# Altium PCB PCB_layout.PcbDoc
Units mil, origin at the board's own origin, x right, y up, seen from the top; angles counter-clockwise.
Board outline 2125 x 2230 mil, 2 copper layers (Top Layer, Bottom Layer); 26 components, 20 nets, 91 pads, 4 vias.
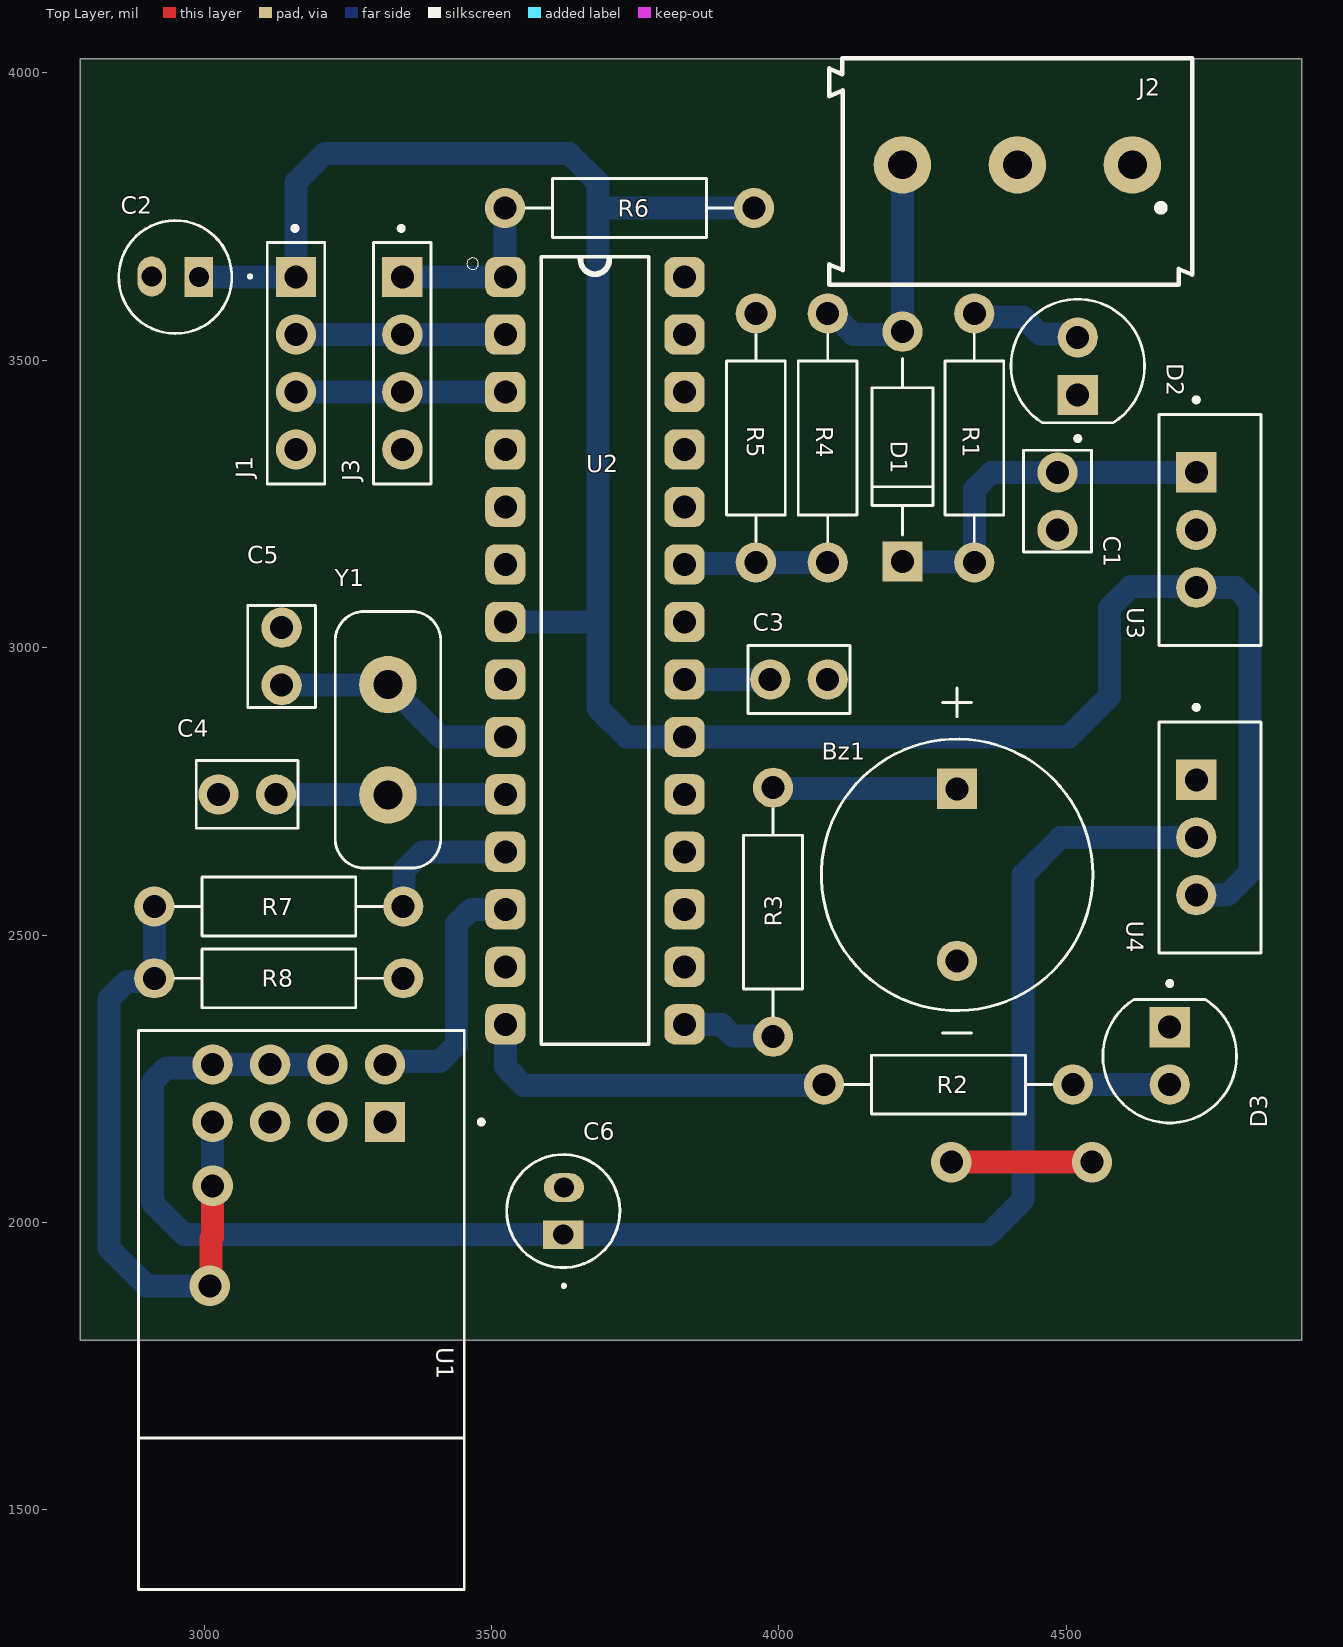
[diagram p0: Top Layer view]
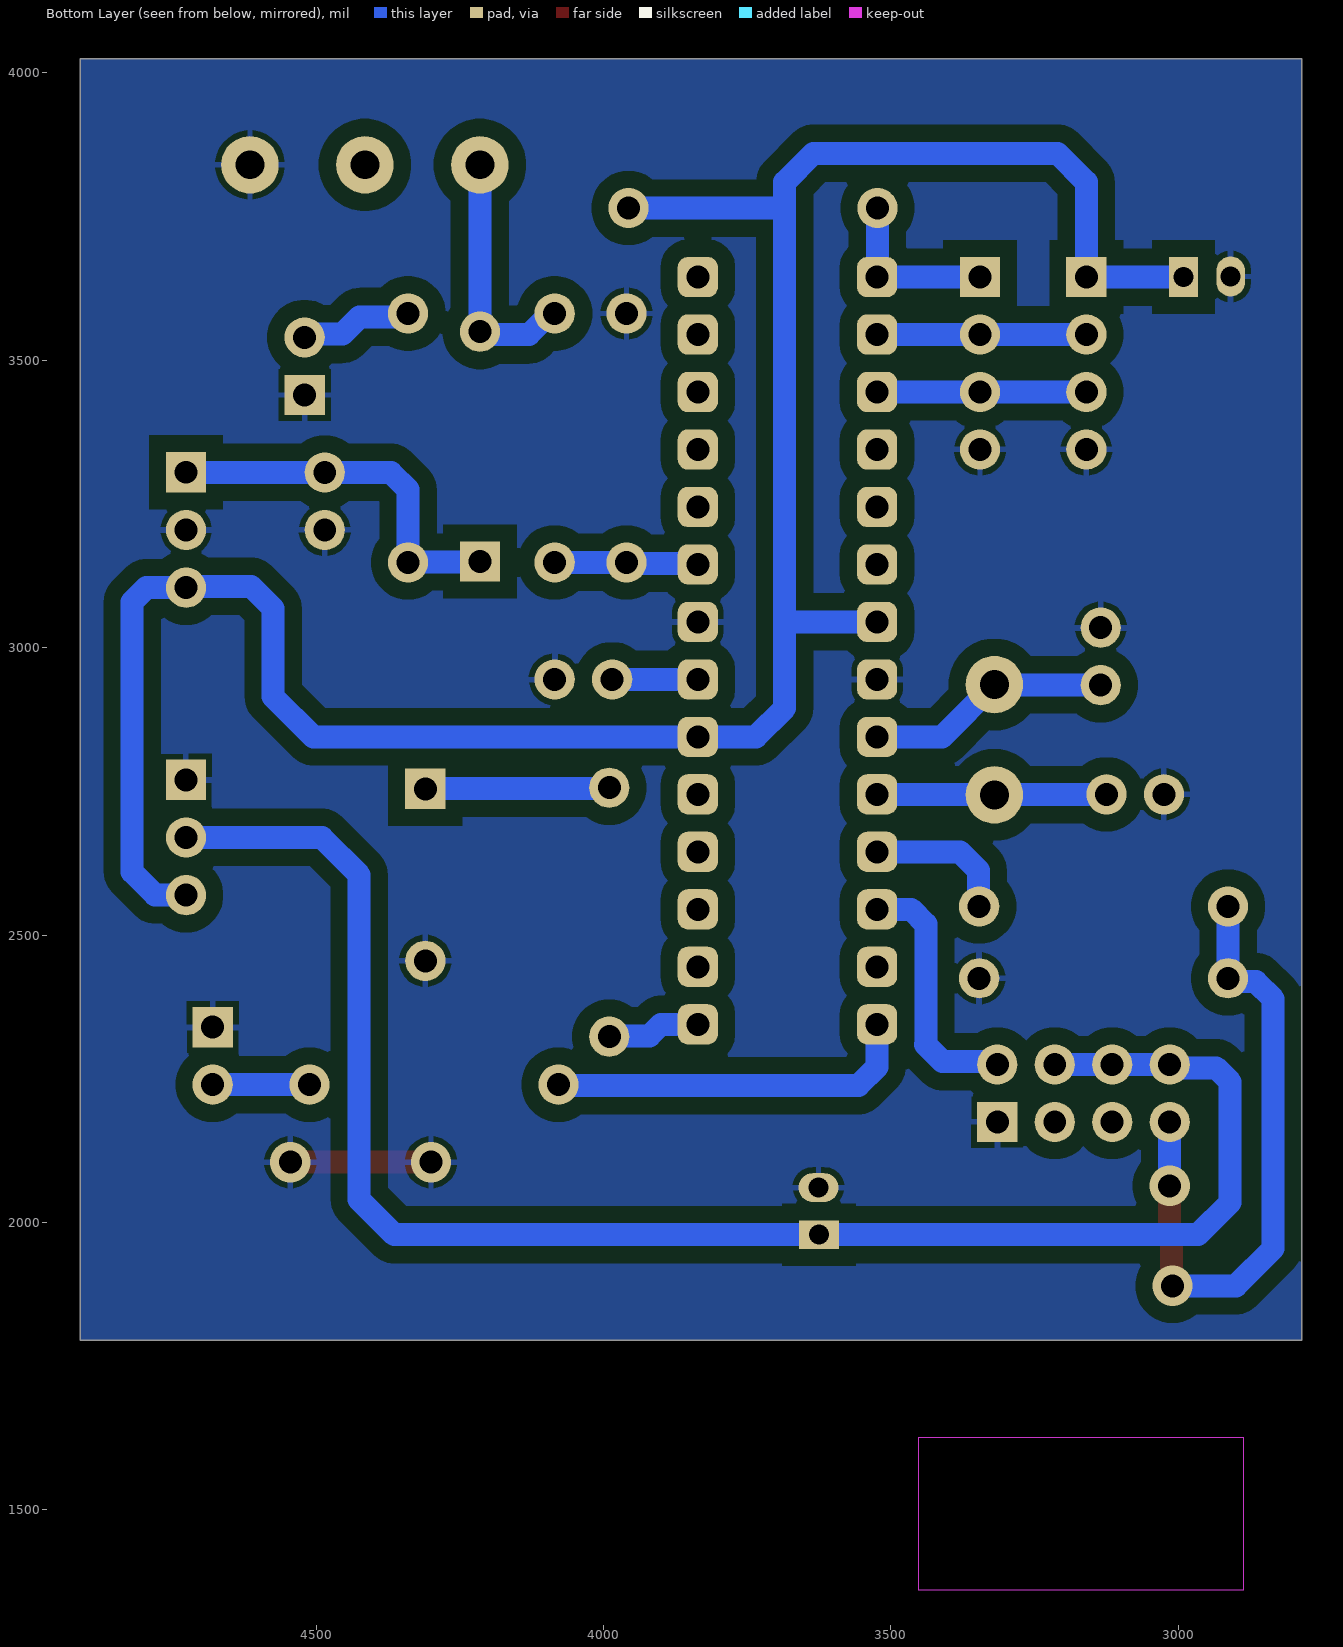
[diagram p1: Bottom Layer view, seen from below]
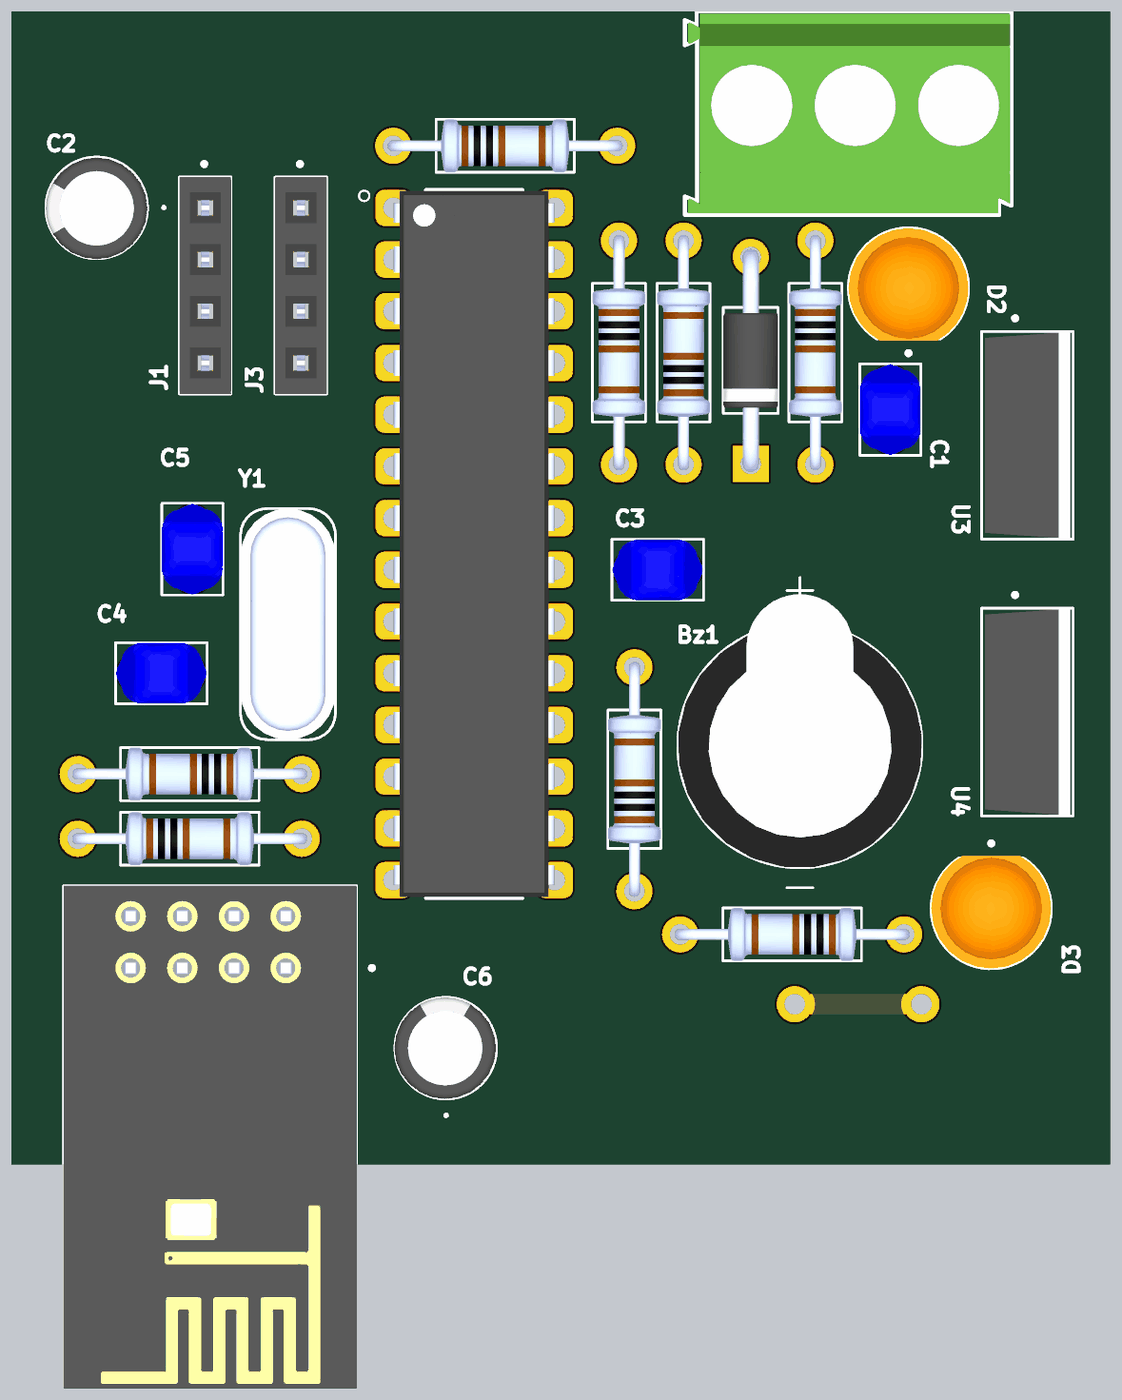
[diagram p2: 3D render of the assembled board from above, using the file's embedded part models]

## Layer stack, top to bottom
Top Solder: solder mask 0.4, Solder Resist, Dk 3.5
Top Layer: signal copper 1.4
Dielectric 1: dielectric 12.6, FR-4, Dk 4.8
Bottom Layer: signal copper 1.4
Bottom Solder: solder mask 0.4, Solder Resist, Dk 3.5

## Board outline
2785,1795 4910,1795 4910,4025 2785,4025

## Design rules (kind name [scope] priority, off if disabled: settings)
Clearance [All] p1: gap=30 ignorepadtopadclearanceinfootprint=FALSE
PolygonConnect [All] p1: connectstyle=Relief reliefconductorwidth=10 reliefentries=4 polygonreliefangle="90 Angle" airgapwidth=10
RoutingVias [All] p1: holewidth=40 width=70 viastyle="Through Hole" minholewidth=40 minwidth=70 maxholewidth=40 maxwidth=70
SolderMaskExpansion [All] p1: expansion=4 istentingtop=FALSE
Width [All] p1: maxlimit=50 minlimit=30 preferedwidth=40
30 further rules are at their usual default settings.

## Components (designator, comment, footprint, x,y, rotation, side; value= is the part's Value field where it differs from the comment)
Bz1 "AI-1223-TWT-12V-R" XDCR_AI-1223-TWT-12V-R 4310,2605 r0 top
C1 "100nF" CAPRB500W50L450T300H550 4485,3305 r270 top
C2 "10uF" CAPPRD500W50D500H1100 2950,3645 r180 top
C3 "100nF" CAPRB500W50L450T300H550 3985,2945 r0 top
C4 "22pF" CAPRB500W50L450T300H550 3125,2745 r180 top
C5 "22pF" CAPRB500W50L450T300H550 3135,2935 r90 top
C6 "10uF" CAPPRD500W50D500H1100 3625,2020 r90 top
D1 "1N4007" DIOAD1060W80L520D270 4215,3350 r90 top
D2 "L08R5000Q1" LEDRD254W57D500H1070 4520,3490 r90 top
D3 "L08R5000Q1" LEDRD254W57D500H1070 4680,2290 r270 top
J1 "Header 4" SULLINS_PPTC041LFBN-RC 3160,3495 r270 top
J2 "TBlock 3" "Terminal block - 3Pins" 4415.07,3840.23 r180 top
J3 "Header 4" SULLINS_PPTC041LFBN-RC 3345,3495 r270 top
R1 "1k" RESAD1100W55L680D260 4340,3365 r90 top
R2 "220" RESAD1100W55L680D260 4295,2240 r0 top
R3 "100" RESAD1100W55L680D260 3990,2540 r270 top
R4 "1k" RESAD1100W55L680D260 4085,3365 r270 top
R5 "1k" RESAD1100W55L680D260 3960,3365 r90 top
R6 "10k" RESAD1100W55L680D260 3740,3765 r180 top
R7 "1k1" RESAD1100W55L680D260 3130,2550 r0 top
R8 "2k2" RESAD1100W55L680D260 3130,2425 r180 top
U1 "ESP8266" XCVR_ESP8266-01/ESP-01 3165,1847.83 r180 top
U2 "ATMEGA328P-PU" DIP794W46P254L2967H457Q28B 3680,2995 r0 top
U3 "LM78__" TO255P1020X450X1968-3 4750,3205 r270 top
U4 "LD1117V33" TO255P1020X450X1968-3 4750,2670 r270 top
Y1 "16MHz" XTAL_ECS-160-20-4X 3320,2840 r270 top

## Footprints (in the part's own frame and the unit in brackets; to place one, negate y for a bottom-side part, rotate by r counter-clockwise, add the part's x,y. Pads: shape width x height; smd on the part's side, far side on the other; paste and mask are expansions set on the pad)
CAPPRD500W50D500H1100 [mil]
  oval 50x70 hole 35: N(41,-1)
  rect 50x70 hole 35: P(-41,0)
  silkscreen extent -131,-98 98,98, body extent -108,-97 108,99, height 434
CAPRB500W50L450T300H550 [mil]
  round 70 hole 40: 1(0,0) 2(100,0)
  silkscreen extent -39,-59 139,59, body extent -38,-59 138,59, height 210
DIOAD1060W80L520D270 [mil]
  round 70 hole 40: A(200,0)
  rect 70x70 hole 40: C(-200,0)
  silkscreen extent -154,-53 154,53, body extent -216,-53 216,53, height 99
DIP794W46P254L2967H457Q28B [mil]
  rrect50% 70x70 hole 40: 1(-155.91,650) 2(-155.91,550) 3(-155.91,450) 4(-155.91,350) 5(-155.91,250) 6(-155.91,150) 7(-155.91,50) 8(-155.91,-50) 9(-155.91,-150) 10(-155.91,-250) 11(-155.91,-350) 12(-155.91,-450) 13(-155.91,-550) 14(-155.91,-650) 15(155.91,-650) 16(155.91,-550) 17(155.91,-450) 18(155.91,-350) 19(155.91,-250) 20(155.91,-150) 21(155.91,-50) 22(155.91,50) 23(155.91,150) 24(155.91,250) 25(155.91,350) 26(155.91,450) 27(155.91,550) 28(155.91,650)
  silkscreen extent -223,-685 94,685, body extent -156,-682 156,683, height 180
LEDRD254W57D500H1070 [mil]
  round 70 hole 40: A(50,0)
  rect 70x70 hole 40: C(-50,0)
  silkscreen extent -130,-116 116,116, body extent -102,-116 116,116, height 358
RESAD1100W55L680D260 [mil]
  round 70 hole 40: 1(-216.54,0) 2(216.54,0)
  silkscreen extent -180,-51 180,51, body extent -227,-51 227,51, height 101
SULLINS_PPTC041LFBN-RC [mil]
  rect 70x70 hole 40: 1(-150,0)
  round 70 hole 40: 2(-50,0) 3(50,0) 4(150,0)
  silkscreen extent -239,-50 210,50, body extent -210,-50 210,50, height 335
"Terminal block - 3Pins" [mil]
  round 100 hole 50: 1(-200,0) 2(0,0) 3(200,0)
  silkscreen extent -304,-185 328,209, body extent -302,-180 322,206, height 543
TO255P1020X450X1968-3 [mil]
  rect 70x70 hole 40: 1(-100.39,-23.82)
  round 70 hole 40: 2(0,-23.82) 3(100.39,-23.82)
  silkscreen extent -230,-89 201,89, body extent -200,-82 200,83, height 901
XCVR_ESP8266-01/ESP-01 [mil]
  rect 70x70 hole 40: 1(-150,-327.17)
  round 70 hole 40: 2(-50,-327.17) 3(50,-327.17) 4(150,-327.17) 5(-150,-427.17) 6(-50,-427.17) 7(50,-427.17) 8(150,-427.17)
  Keep-Out Layer region: 279.13,222.44 -287.8,222.44 -287.8,486.22 279.13,486.22
  silkscreen extent -321,-486 279,486, body extent -288,-486 278,486, height 256
XDCR_AI-1223-TWT-12V-R [mil]
  round 70 hole 40: N(0,-149.61)
  rect 70x70 hole 40: P(0,149.61)
  silkscreen extent -236,-275 236,325, body extent -236,-236 236,293, height 376
XTAL_ECS-160-20-4X [mm]
  round 2.54 hole 1.27: 1(-2.44,0) 2(2.44,0)
  silkscreen extent -5.68,-2.33 5.68,2.33, body extent -5.68,-2.32 5.68,2.32, height 3.5

## Part data
Bz1: library part Buzzer, "ELECTRO-MECHANICAL AUDIO INDICATOR", Package="2225 PUI Audio", Availability="In Stock", MF="PUI Audio,", MP=AI-1223-TWT-12V-R, Price=None, Purchase-URL=https://pricing.snapeda.com/search/part/AI-1223-TWT-12V-R/?ref=eda
C1 C3 C4 C5: library part "Ceramic capacitor", "2200 pF Â±10% 250V Ceramic Capacitor X7R Radial", Package="Radial TDK", Check_prices=https://www.snapeda.com/parts/FG24X7R2E222KNT06/TDK/view-part/?ref=eda, Digi-Key_Part_Number=445-173386-1-ND, MF=TDK, MP=FG24X7R2E222KNT06, Purchase-URL=https://pricing.snapeda.com/search/part/FG24X7R2E222KNT06/?ref=eda, SnapEDA_Link=https://www.snapeda.com/parts/FG24X7R2E222KNT06/TDK/view-part/?ref=snap
C2 C6: library part "Electrolytic capacitor", "FS-A", Package=None, Availability=Unavailable, MF="{'manufacturer': u'Panasonic'}", MP=EEUFS0J221B, Price=None
D1: "Diode Switching 1KV 1A 2-Pin DO-41", Package=None, Availability=Unavailable, MP=1N4007, Price=None
D2 D3: library part LED, "LED, Orange, Through Hole, T-1 3/4 (5mm), 30 mA, 2.1 V, 635 nm", Package=None, Availability=Unavailable, MF="{'manufacturer': u'LED Technology'}", MP=L08R5000Q1, Price=None
J1 J3: library part "Female header - 4Pins", "4 Position Header Connector Through Hole", Package=None, Availability=Warning, Check_prices=https://www.snapeda.com/parts/PPTC041LFBN-RC/Sullins%20Connector%20Solutions/view-part/285917/?ref=eda, MF="Sullins Connector", MP=PPTC041LFBN-RC, Price=None, Purchase-URL=https://pricing.snapeda.com/search/part/PPTC041LFBN-RC/?ref=eda, SnapEDA_Link=https://www.snapeda.com/parts/PPTC041LFBN-RC/Sullins%20Connector%20Solutions/view-part/285917/?ref=snap
J2: library part "3Pins Terminal block", "5.08 MM TERMINAL BLOCK;", Package=None, Availability="In Stock", Check_prices=https://www.snapeda.com/parts/691216510003S/Wurth+Electronics+Inc/view-part/?ref=eda, MF="Wurth Electronics", MP=691216510003S, Price=None, Purchase-URL=https://pricing.snapeda.com/search/part/691216510003S/?ref=eda, SnapEDA_Link=https://www.snapeda.com/parts/691216510003S/Wurth+Electronics+Inc/view-part/?ref=snap
R1 R2 R3 R4 R5 R6 R7 R8: library part "Resistor (0.25W)", "(MFR-25FBF52-10K) 10,2 kOhm bei 1% 0,25W, 1/4W Durchbohrlochwiderstand Axial Metal Film", Package="Axial Yageo", Digi-Key_Part_Number=10.2KXBK-ND, MF=Yageo, MP=MFR-25FBF52-10K, Purchase-URL=https://pricing.snapeda.com/search/part/MFR-25FBF52-10K/?ref=eda, SnapEDA_Link=https://www.snapeda.com/parts/MFR-25FBF52-10K/Yageo/view-part/424333/?ref=snap
U1: library part "ESP8266-01 Module", "MakerFocus 4pcs ESP8266 ESP-01 Serial Wireless WiFi Transceiver Receiver Module 1MB SPI Flash DC3.0-3.6V Internet of Things WiFi Module Board Compatible with Ar duino", Package=None, Availability=Unavailable, MP=ESP8266-01/ESP-01, Price=None
U2: "ATmega Series 20 MHz 32 KB Flash 2 KB SRAM 8-Bit Microcontroller - DIP-28", Package=None, Availability=Unavailable, MP=ATMEGA328P-PU, Price=None
U3 U4: Package=None, Availability=Unavailable, Price=None
  U3: MP=LM7805CT/NOPB
  U4: MP=LD1117V33
Y1: library part "Crystal oscilator", "CRYSTAL T/H", Package=None, Availability=Unavailable, MF="{'manufacturer': u'ECS Inc.'}", MP=ECS-160-S-4, Price=None

## Via types
v1: diameter 70, hole 40, Top Layer to Bottom Layer, 4 vias

## Nets (pads, with @x,y where several pads share a name; then routed paths per layer and width w, separated by ;. In a path a pad name is that pad's centre, name@x,y a point inside that pad or via, vN(x,y) a via of type N, cw(c..) or ccw(c..) an arc to the next point about the centre after c; other vN are vias at no path point)
+3V3: C6.P U1.6 U1.7 U1.8 U4.2 | length 2984
  Bottom Layer w40: U1.6 U1.7 U1.8 3009.26,2269.26 2934.26,2269.26 2910,2245 2910,2035 2966,1979 4364,1979 4425,2040 4425,2605 4490,2670 U4.2
Battery: D1.A J2.3 R4.1 | length 437.5
  Bottom Layer w40: R4.1 4093.12,3581.54 4129.65,3545 4210,3545 D1.A D1.A 4215.04,3840.2 J2.3
battery_level: R4.2 R5.1 U2.23 | length 250.5
  Bottom Layer w40: U2.23 3837.64,3146.73 3958.27,3146.73 R5.1 R4.2
buzzer: R3.2 U2.15 | length 163
  Bottom Layer w40: U2.15 3900,2345 3920,2325 3988.46,2325 R3.2
esp_rx: R7.2 U2.11 | length 253
  Bottom Layer w40: R7.2 3347.94,2551.41 3347.94,2612.94 3380,2645 U2.11
esp_tx: U1.5 U2.12 | length 444.7
  Bottom Layer w40: U1.5 3320,2280 3410,2280 3440,2310 3439.09,2310.91 3439.09,2519.09 3465,2545 U2.12
GND: Bz1.N C1.2 C2.N C3.2 C4.2 C5.2 C6.N D2.C D3.C J1.4 J2.1 J3.4 R5.2 R8.1 U1.1 U2.8 U2.22 U3.2 U4.1 | length 245
  Top Layer w40: v1(4300,2105) v1(4545,2105)
led_indicator: R2.1 U2.14 | length 643
  Bottom Layer w40: U2.14@3523.78,2344.69 U2.14 3524.09,2270.91 3556.54,2238.46 4076.93,2238.46 R2.1
NetBz1_P: Bz1.P R3.1 | length 320.8
  Bottom Layer w40: R3.1 3990.96,2755.57 4309.04,2755.57 Bz1.P
NetC1_1: C1.1 D1.C R1.1 U3.1 | length 650.9
  Bottom Layer w40: D1.C 4215.77,3149.23 4339.23,3149.23 R1.1 4340,3275 4370,3305 C1.1 4485.2,3305.2 4725.98,3305.2 U3.1
NetC3_1: C3.1 U2.21 | length 149.1
  Bottom Layer w40: U2.21 C3.1
NetD2_A: D2.A R1.2 | length 197.2
  Bottom Layer w40: R1.2 4345.74,3575.8 4424.2,3575.8 4454.26,3545.74 4514.26,3545.74 D2.A
NetD3_A: D3.A R2.2 | length 168.5
  Bottom Layer w40: R2.2 D3.A
NetR7_1: R7.1 R8.2 U1.4 | length 1141.5
  Top Layer w40: v1(3010,1890) 3011.91,1891.91 3011.91,1971.91 3015,1975 v1(3015,2064)
  Bottom Layer w40: R7.1 R8.2 2907.72,2419.26 2865,2419.26 2835,2389.26 2835,1955 2900,1890 v1(3010,1890) ; v1(3015,2064) U1.4
reset: J3.1 R6.2 U2.1 | length 299.4
  Bottom Layer w40: J3.1 U2.1 3523.78,3645.31 3523.78,3764.68 R6.2
rx: J1.3 J3.3 U2.3 | length 364.1
  Bottom Layer w40: J1.3 J3.3 U2.3
tx: J1.2 J3.2 U2.2 | length 364.1
  Bottom Layer w40: J1.2 J3.2 U2.2
VCC: C2.P J1.1 R6.1 U2.7 U2.20 U3.3 U4.3 | length 4195.6
  Bottom Layer w40: C2.P J1.1 3160,3810 3210,3860 3635,3860 3685,3810 3685,3765 ; U2.7 3680,3045 3685,3040 ; R6.1 3685,3765 ; U4.3 4726.57,2570 4780,2570 4820,2610 4820,3080 4795.39,3104.61 U3.3 4724.11,3106.67 4613.03,3106.67 4575,3068.64 4575,2915 4505,2845 U2.20 3735,2845 3685,2895 3685,3040 ; 3685,3040 3685,3765
xtal1: C5.1 U2.9 Y1.1 | length 427.3
  Bottom Layer w40: C5.1 3135.53,2935.53 3319.47,2935.53 Y1.1 3411.06,2845 U2.9
xtal2: C4.1 U2.10 Y1.2 | length 400
  Bottom Layer w40: C4.1 3125.53,2744.47 3319.47,2744.47 Y1.2 3320.53,2744.47 3523.56,2744.47 U2.10
pads on no net: J2.2 U1.2 U1.3 U2.4 U2.5 U2.6 U2.13 U2.16 U2.17 U2.18 U2.19 U2.24 U2.25 U2.26 U2.27 U2.28

## Polygon pours and split planes (outlines as drawn)
GND on Bottom Layer "GND_L02_P000" (solid, pour order 0): 2785,4025 2785,1795 4910,1795 4910,4025